# Altium PCB Rigid-Flex 2 - PCB Design.PcbDoc
Units mil, origin at the board's own origin, x right, y up, seen from the top; angles counter-clockwise.
Board outline 5000 x 3500 mil, 6 copper layers (Top Layer, GND, Mid1, Mid2, PWR, Bottom Layer), stack 32.112 mil thick; 21 components, 29 nets, 172 pads, 0 vias.
Unrouted connection lines stored in the file: 46.
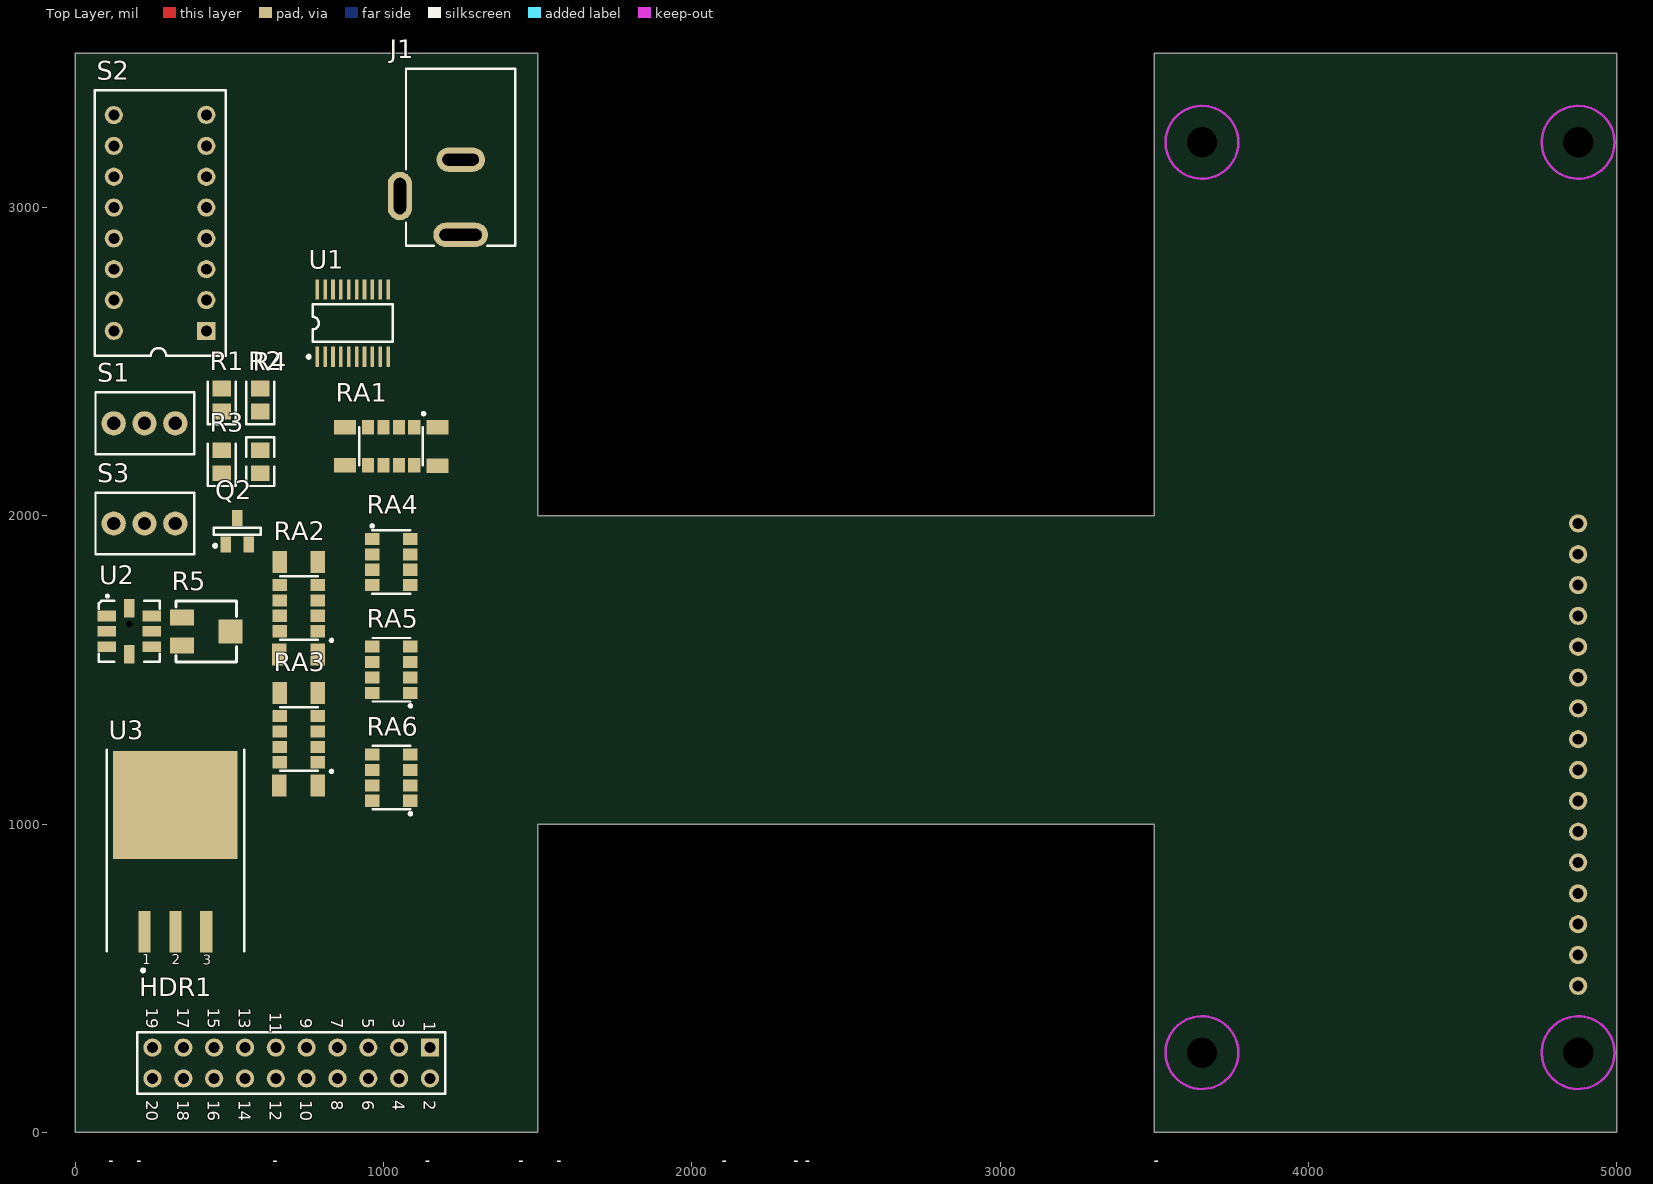
[diagram p0: Top Layer view]
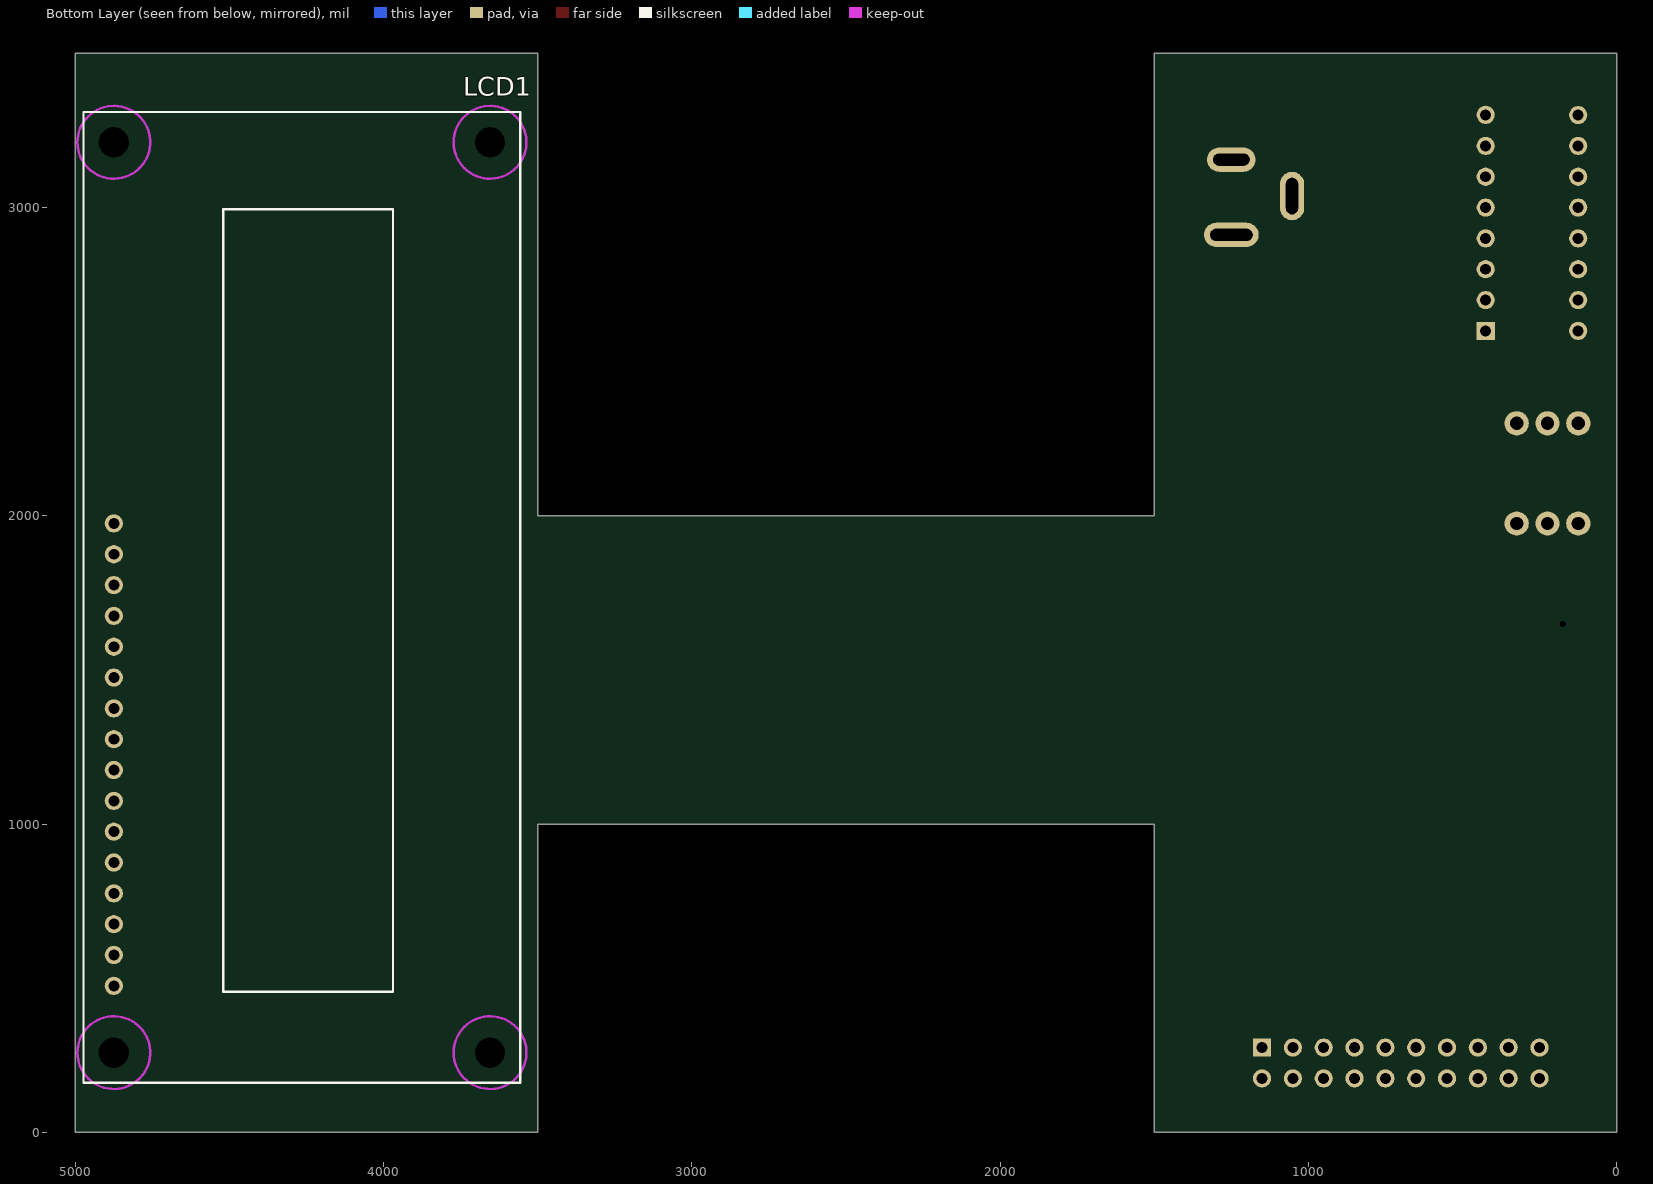
[diagram p1: Bottom Layer view, seen from below]
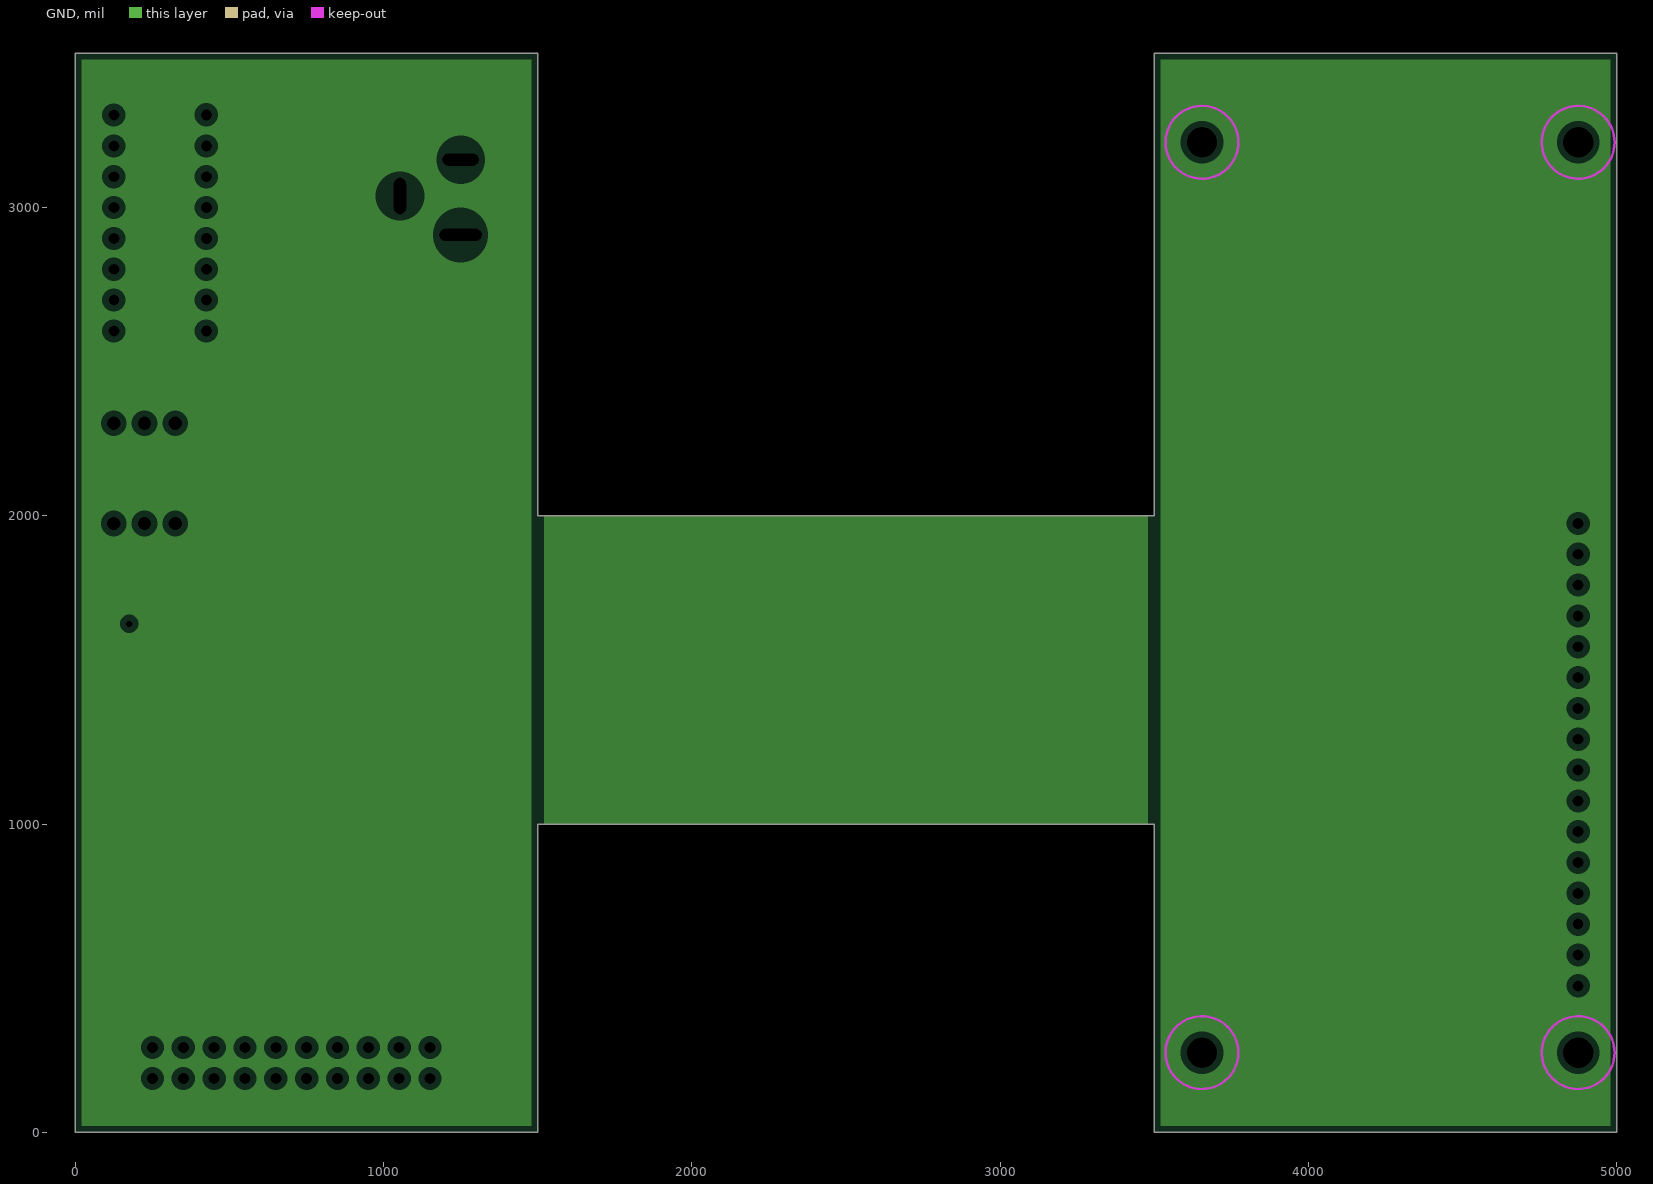
[diagram p2: GND, clearances drawn from the general rule]
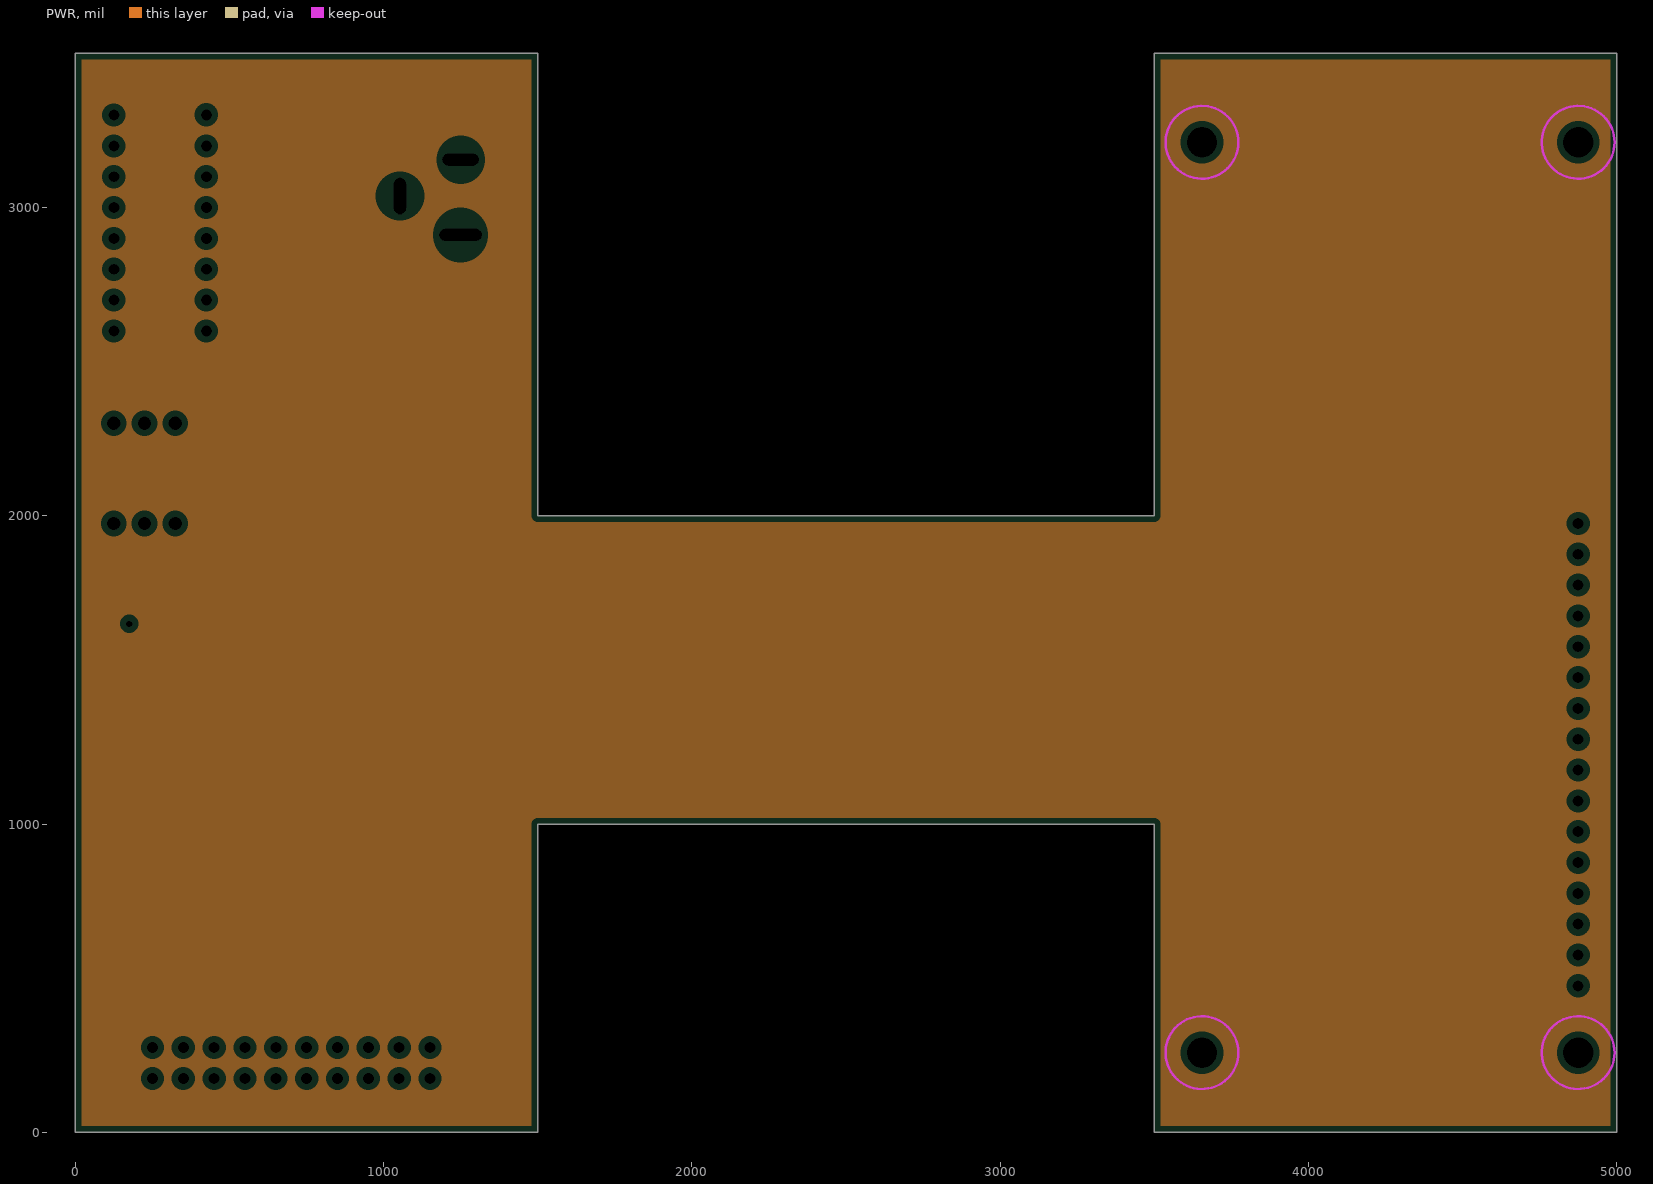
[diagram p3: PWR, clearances drawn from the general rule]

## Layer stack, top to bottom
Top Solder: solder mask 0.472, FC-001, Dk 4
Top Solder: solder mask 0.4, Solder Resist, Dk 3.5
Top Layer: signal copper 1.4
Dielectric 4: prepreg 2.8, PP-006, Dk 4.1
GND: plane copper 1.378
Dielectric 2: prepreg 2.8, PP-006, Dk 4.1
Mid1: signal copper 1.378
Dielectric 1: dielectric 12.6, FR-4, Dk 4.8
Mid2: signal copper 1.378
Dielectric 3: prepreg 2.8, PP-006, Dk 4.1
PWR: plane copper 1.378
Dielectric 5: prepreg 2.8, PP-006, Dk 4.1
Bottom Layer: signal copper 1.4
Flex Bottom Coverlay: solder mask 0.4, Solder Resist, Dk 3.5
Flex Bottom Coverlay: solder mask 0.472, FC-001, Dk 4

## Board outline
0,0 1500,0 1500,1000 3500,1000 3500,0 5000,0 5000,3500 3500,3500 3500,2000 1500,2000 1500,3500 0,3500
board region "Rigid Layer Stack Region - Right": 3500,3500 3500,0 5000,0 5000,3500
board region "Rigid Layer Stack Region - Left": 0,0 1500,0 1500,3500 0,3500
board region Flex: 1500,1000 3500,1000 3500,2000 1500,2000

## Design rules (kind name [scope] priority, off if disabled: settings)
Clearance [All] p1: gap=10 ignorepadtopadclearanceinfootprint=FALSE except(0: Arc-Hole Track-Hole SMDPad-Hole THPad-Hole Via-Hole Fill-Hole Poly-Hole Region-Hole Text-Hole)
DiffPairsRouting [All] p1: maxlimit=10 minlimit=10 mostfreqgap=10 toplayer_minwidth=15 toplayer_maxwidth=15 toplayer_prefwidth=15 midlayer1_minwidth=15 midlayer1_maxwidth=15 midlayer1_prefwidth=15 midlayer2_minwidth=15 midlayer2_maxwidth=15 midlayer2_prefwidth=15 bottomlayer_minwidth=15 bottomlayer_maxwidth=15 bottomlayer_prefwidth=15 substack1={B5968FE7-CA1D-4CA5-8B2D-EEA0998704F7} toplayer_{b5968fe7-ca1d-4ca5-8b2d-eea0998704f7}_minwidth=15 toplayer_{b5968fe7-ca1d-4ca5-8b2d-eea0998704f7}_maxwidth=15 toplayer_{b5968fe7-ca1d-4ca5-8b2d-eea0998704f7}_prefwidth=15 midlayer1_{b5968fe7-ca1d-4ca5-8b2d-eea0998704f7}_minwidth=15 midlayer1_{b5968fe7-ca1d-4ca5-8b2d-eea0998704f7}_maxwidth=15 midlayer1_{b5968fe7-ca1d-4ca5-8b2d-eea0998704f7}_prefwidth=15 midlayer2_{b5968fe7-ca1d-4ca5-8b2d-eea0998704f7}_minwidth=15 midlayer2_{b5968fe7-ca1d-4ca5-8b2d-eea0998704f7}_maxwidth=15 midlayer2_{b5968fe7-ca1d-4ca5-8b2d-eea0998704f7}_prefwidth=15 bottomlayer_{b5968fe7-ca1d-4ca5-8b2d-eea0998704f7}_minwidth=15 bottomlayer_{b5968fe7-ca1d-4ca5-8b2d-eea0998704f7}_maxwidth=15 bottomlayer_{b5968fe7-ca1d-4ca5-8b2d-eea0998704f7}_prefwidth=15 maxuncoupledlength=500
PlaneClearance [All] p1: clearance=20
PlaneConnect [All] p1: planeconnectstyle=Relief reliefexpansion=20 reliefentries=4 reliefconductorwidth=10 reliefairgap=10
PolygonConnect [All] p1: connectstyle=Relief reliefconductorwidth=10 reliefentries=4 polygonreliefangle="90 Angle" airgapwidth=10
RoutingVias [All] p1: holewidth=28 width=50 viastyle="Through Hole" minholewidth=28 minwidth=50 maxholewidth=28 maxwidth=50
SolderMaskExpansion [All] p1: expansion=4 istentingtop=FALSE
SupplyNets "Schematic Supply Nets_1" [InNet('GND')] p1: voltage=0.000
SupplyNets "Schematic Supply Nets" [InNet('5V')] p2: voltage=0.000
Width [All] p1: maxlimit=10 minlimit=10 preferedwidth=10 substack1={B5968FE7-CA1D-4CA5-8B2D-EEA0998704F7}
27 further rules are at their usual default settings.

## Classes and differential pairs
net class LCD_DB[7..0]: LCD_DB0 LCD_DB1 LCD_DB2 LCD_DB3 LCD_DB4 LCD_DB5 LCD_DB6 LCD_DB7

## Components (designator, comment, footprint, x,y, rotation, side; value= is the part's Value field where it differs from the comment)
HDR1 "Header 10X2" HDR2X10 1150,275 r180 top
J1 "KLD-0202-B" KLD-0202 1250,3450 r270 top
LCD1 "162A" 162A 4875,475 r90 bottom
Q2 "2N7002" SO-G3 525,1950 r0 top
R1 "68R" CC2012-0805 475,2375 r90 top
R2 "68R" CC2012-0805 600,2375 r90 top
R3 "560R" CC2012-0805 475,2175 r90 top
R4 "10K" CR2012-0805 600,2175 r90 top
R5 "20K" POT4MM-2 425,1625 r0 top
RA1 "4K7" MNR34T 1025,2225 r90 top
RA2 "4K7" MNR34T 725,1700 r0 top
RA3 "4K7" MNR34T 725,1275 r0 top
RA4 "270R" MNR34 1025,1850 r0 top
RA5 "270R" MNR34 1025,1500 r180 top
RA6 "270R" MNR34 1025,1150 r180 top
S1 "TL36WW050" PCB_SWITCH 325,2300 r180 top
S2 "A6ER-8104" DIP-16-KEY 425,2600 r90 top
S3 "TL36WW050" PCB_SWITCH 325,1975 r180 top
U1 "XCF02SVO20C" VO20 900,2625 r0 top
U2 "ADXL202E" E-8 175,1625 r0 top
U3 "LM1084IS-ADJ" TO-263 225,650 r0 top

## Footprints (in the part's own frame and the unit in brackets; to place one, negate y for a bottom-side part, rotate by r counter-clockwise, add the part's x,y. Pads: shape width x height; smd on the part's side, far side on the other; paste and mask are expansions set on the pad)
162A [mm]
  round 1.5 hole 0.9: 1(0,0) 2(2.54,0) 3(5.08,0) 4(7.62,0) 5(10.16,0) 6(12.7,0) 7(15.24,0) 8(17.78,0) 9(20.32,0) 10(22.86,0) 11(25.4,0) 12(27.94,0) 13(30.48,0) 14(33.02,0) 15(35.56,0) 16(38.1,0)
  round 2.3 hole 2.5 unplated: M1(-5.5,0) M2(69.5,0) M3(-5.5,-31) M4(69.5,-31)
  Keep-Out Layer circle w0.2: c69.5,0 r3
  Keep-Out Layer circle w0.2: c69.5,-31 r3
  Keep-Out Layer circle w0.2: c-5.5,-31 r3
  Keep-Out Layer circle w0.2: c-5.5,0 r3
  silkscreen extent -8,-33.5 72,2.5, body extent -8.01,-33.5 72,2.5, height 10.16
CC2012-0805 [mm]
  rect 1.3x1.5 smd: 1(-0.945,-0.007) 2(0.955,-0.007)
  silkscreen extent -1.99,-1.16 1.51,1.14, body extent -1.52,-0.7 1.52,0.7, height 0.76
CR2012-0805 [mm]
  rect 1.3x1.5 smd: 1(-0.946,0) 2(0.954,0)
  silkscreen extent -2,-1.15 2,1.15, body extent -1.52,-0.7 1.52,0.7, height 0.76
DIP-16-KEY [mm]
  rect 1.5x1.5 hole 0.9: 1(-0.011,0.001)
  round 1.5 hole 0.9: 2(2.529,0.001) 3(5.069,0.001) 4(7.609,0.001) 5(10.149,0.001) 6(12.689,0.001) 7(15.229,0.001) 8(17.789,0.001) 9(17.769,7.621) 10(15.229,7.621) 11(12.689,7.621) 12(10.149,7.621) 13(7.609,7.621) 14(5.069,7.621) 15(2.529,7.621) 16(-0.011,7.621)
  silkscreen extent -2.06,-1.59 19.82,9.2, body extent -2.03,-1.52 19.81,9.14, height 7.11
E-8 [mil]
  round 15 hole 20 unplated: 0(-0.02,23.98)
  rect 60x35 smd: 1(-72.85,49.98) 2(-72.85,-0.02) 3(-72.85,-50.02) 5(72.82,-50.02) 6(72.82,-0.02) 7(72.82,49.98)
  rect 35x60 smd: 4(-0.02,-74.82) 8(-0.02,74.79)
  silkscreen extent -98,-98 99,118, body extent -95,-95 95,95, height 80
HDR2X10 [mm]
  rect 1.5x1.5 hole 0.9: 1(-0.011,0.007)
  round 1.5 hole 0.9: 2(-0.011,2.547) 3(2.529,0.007) 4(2.529,2.547) 5(5.069,0.007) 6(5.069,2.547) 7(7.609,0.007) 8(7.609,2.547) 9(10.149,0.007) 10(10.149,2.547) 11(12.689,0.007) 12(12.689,2.547) 13(15.229,0.007) 14(15.229,2.547) 15(17.769,0.007) 16(17.769,2.547) 17(20.309,0.007) 18(20.309,2.547) 19(22.849,0.007) 20(22.849,2.547)
  silkscreen extent -1.28,-1.26 24.12,3.82, body extent -1.27,-1.27 24.13,3.81, height 10
KLD-0202 [mm]
  oval 2x4.5 hole 1 slot 3.5 at 90 deg: 1(13.692,-0.001)
  oval 2x4 hole 1 slot 3 at 90 deg: 2(7.492,-0.001)
  oval 4x2 hole 1 slot 3 at 0 deg: 3(10.492,-5.001)
  silkscreen extent -0.01,-4.5 14.59,4.5, body extent 0,-4.44 14.6,4.45, height 7.62
MNR34 [mm]
  rect 1.2x1 smd: 1(-1.578,1.898) 2(-1.578,0.628) 3(-1.578,-0.642) 4(-1.578,-1.912) 5(1.572,-1.912) 6(1.572,-0.642) 7(1.572,0.628) 8(1.572,1.898)
  silkscreen extent -1.68,-2.62 1.55,3.06, body extent -2.03,-2.29 2.03,2.29, height 1.27
MNR34T [mm]
  rect 1.2x1 smd: 1(1.575,-1.896) 2(1.575,-0.626) 3(1.575,0.644) 4(1.575,1.914) 5(-1.575,1.914) 6(-1.575,0.644) 7(-1.575,-0.626) 8(-1.575,-1.896)
  rect 1.2x1.8 smd: STP(-1.6,-3.801) STP(-1.575,3.819) STP(1.575,3.819) STP(1.575,-3.801)
  silkscreen extent -1.55,-2.76 2.79,2.62, body extent -1.65,-2.71 1.68,2.72, height 2
PCB_SWITCH [mm]
  round 2 hole 1.1: 1(0.011,0.005) 2(2.551,0.005) 3(5.091,0.005)
  silkscreen extent -1.54,-2.53 6.59,2.55, body extent -1.52,-2.54 6.6,2.54, height 15
POT4MM-2 [mm]
  rect 2x1.3 smd: CCW(-2.008,-1.162) CW(-2.008,1.138)
  rect 2x2 smd: W(1.992,-0.012)
  silkscreen extent -2.51,-2.51 2.49,2.49, body extent -2.92,-2.41 2.92,2.41, height 3.05
SO-G3 [mm]
  rect 0.85x1.3 smd: 1(-0.939,-1.107) 2(0.961,-1.107) 3(0.011,1.093)
  silkscreen extent -1.94,-1.33 1.96,0.29, body extent -1.65,-1.52 1.65,1.51, height 2.54
TO-263 [mm]
  rect 1x3.4 smd: 1(-0.006,0.009) 2(2.534,0.009) 3(5.074,0.009)
  rect 10.25x8.9 smd: 4(2.534,10.459)
  silkscreen extent -3.11,-3.29 8.19,15.01, body extent -2.29,-1.14 7.37,14.35, height 2.03
VO20 [mm]
  rect 0.3x1.65 smd: 1(-2.929,-2.778) 2(-2.279,-2.778) 3(-1.629,-2.778) 4(-0.979,-2.778) 5(-0.329,-2.778) 6(0.321,-2.778) 7(0.971,-2.778) 8(1.621,-2.778) 9(2.271,-2.778) 10(2.921,-2.778) 11(2.921,2.772) 12(2.271,2.772) 13(1.621,2.772) 14(0.971,2.772) 15(0.321,2.772) 16(-0.329,2.772) 17(-0.979,2.772) 18(-1.629,2.772) 19(-2.279,2.772) 20(-2.929,2.772)
  silkscreen extent -3.75,-2.9 3.3,1.55, body extent -3.3,-3.56 3.3,3.55, height 1.52

## Part data
HDR1: "Header, 10-Pin, Dual row", Revision="July-2002: Re-released for DXP Platform."
J1: "Low Voltage Power Supply Connector", Manufacturer=Kycon, AEMS Code=3510211
LCD1: "16 char * 2 line LCD character display with b/light"
Q2: "N Channel Mosfet"
R1 R2: library part RES_2, "Resistor", AEMS Code=1200821
R3 R4: library part RES, "Resistor"
  R3: AEMS Code=1200723
  R4: AEMS Code=1200006JT
R5: library part "RPot SM", "Square Trimming Potentiometer", AEMS Code=1400226
RA1 RA2 RA3 RA4 RA5 RA6: library part MNR34, "3216x4 Resistor Array"
  RA1 RA2 RA3: AEMS Code=1300330
  RA4 RA5 RA6: AEMS Code=1310010
S1 S3: library part PCB_MOUNT_SWITCH, "SPDT Subminiature Toggle Switch", Supplier=FARNELL, Supplier Code=150-559
S2: "DIP Switch Side actuator long liver Piano Key", Revision="July-2002: Re-released for DXP Platform."
U1: "XCF00S Series, Platform Flash In-System Programmable Configuration 3.3V PROM, 20-Pin TSOP, 2-Megabit, Commercial Grade", PackageDocument="ver1.0, May-2003", AEMS Code="CHANGED VALUE", Code_JEDEC=MO-153-AC, DatasheetDocument="ver2.3, May-2004", PackageReference=VO20
U2: "Accelerometer with Digital Output"
U3: "5A Low Dropout Possitive Regulators"

## Nets (pads, with @x,y where several pads share a name; then routed paths per layer and width w, separated by ;. In a path a pad name is that pad's centre, name@x,y a point inside that pad or via, vN(x,y) a via of type N, cw(c..) or ccw(c..) an arc to the next point about the centre after c; other vN are vias at no path point)
5V: LCD1.2 LCD1.15 R5.CW RA1.1 RA1.2 RA1.3 RA1.4 RA2.1 RA2.2 RA2.3 RA2.4 RA3.1 RA3.2 RA3.3 RA3.4
GND: LCD1.1 Q2.2 R4.1 R5.CCW
LCD_CONTRAST: LCD1.3 R5.W
LCD_DB0: RA5.5
LCD_DB1: RA5.6
LCD_DB2: RA5.7
LCD_DB3: RA5.8
LCD_DB4: RA4.5
LCD_DB5: RA4.6
LCD_DB6: RA4.7
LCD_DB7: RA4.8
LCD_DB#0: LCD1.7 RA2.5 RA5.4
LCD_DB#1: LCD1.8 RA2.6 RA5.3
LCD_DB#2: LCD1.9 RA2.7 RA5.2
LCD_DB#3: LCD1.10 RA2.8 RA5.1
LCD_DB#4: LCD1.11 RA1.5 RA4.4
LCD_DB#5: LCD1.12 RA1.6 RA4.3
LCD_DB#6: LCD1.13 RA1.7 RA4.2
LCD_DB#7: LCD1.14 RA1.8 RA4.1
LCD_E: RA6.8
LCD_E#: LCD1.6 RA3.8 RA6.1
LCD_LIGHT: R3.1
LCD_RS: RA6.6
LCD_RS#: LCD1.4 RA3.6 RA6.3
LCD_RW: RA6.7
LCD_RW#: LCD1.5 RA3.7 RA6.2
NetLCD1_16: LCD1.16 R1.1 R2.1
NetQ2_1: Q2.1 R3.2 R4.2
NetQ2_3: Q2.3 R1.2 R2.2
pads on no net: HDR1.1 HDR1.2 HDR1.3 HDR1.4 HDR1.5 HDR1.6 HDR1.7 HDR1.8 HDR1.9 HDR1.10 HDR1.11 HDR1.12 HDR1.13 HDR1.14 HDR1.15 HDR1.16 HDR1.17 HDR1.18 HDR1.19 HDR1.20 J1.1 J1.2 J1.3 LCD1.M1 LCD1.M2 LCD1.M3 LCD1.M4 RA1.STP RA2.STP RA3.5 RA3.STP RA6.4 RA6.5 S1.1 S1.2 S1.3 S2.1 S2.2 S2.3 S2.4 S2.5 S2.6 S2.7 S2.8 S2.9 S2.10 S2.11 S2.12 S2.13 S2.14 S2.15 S2.16 S3.1 S3.2 S3.3 U1.1 U1.2 U1.3 U1.4 U1.5 U1.6 U1.7 U1.8 U1.9 U1.10 U1.11 U1.12 U1.13 U1.14 U1.15 U1.16 U1.17 U1.18 U1.19 U1.20 U2.0 U2.1 U2.2 U2.3 U2.4 U2.5 U2.6 U2.7 U2.8 U3.1 U3.2 U3.3 U3.4

## Polygon pours and split planes (outlines as drawn)
no net on GND (split plane): 4979.9,3479.9 4979.9,20.1 3520.1,20.1 3520.1,3479.9
no net on GND (split plane): 1479.9,3479.9 1479.9,20.1 20.1,20.1 20.1,3479.9
no net on PWR (split plane): 4979.9,3479.9 4979.9,20.1 3520.1,20.1 3520.1,1000 3519.71,1003.92 3518.57,1007.69 3516.71,1011.16 3514.21,1014.21 3511.16,1016.71 3507.69,1018.57 3503.92,1019.71 3500,1020.1 1500,1020.1 1496.08,1019.71 1492.31,1018.57 1488.84,1016.71 1485.79,1014.21 1483.29,1011.16 1481.43,1007.69 1480.29,1003.92 1479.9,1000 1479.9,20.1 20.1,20.1 20.1,3479.9 1479.9,3479.9 1479.9,2000 1480.29,1996.08 1481.43,1992.31 1483.29,1988.84 1485.79,1985.79 1488.84,1983.29 1492.31,1981.43 1496.08,1980.29 1500,1979.9 3500,1979.9 3503.92,1980.29 3507.69,1981.43 3511.16,1983.29 3514.21,1985.79 3516.71,1988.84 3518.57,1992.31 3519.71,1996.08 3520.1,2000 3520.1,3479.9

## Silkscreen, mask and mechanical layers (free items; w line width, h text height)
Flex Top Overlay:
  text "Altium Advanced Training: '.Pcb_File_Name_No_Path'" at 5,-196.68 h100
Layer Stack:
  drawing of 492 lines, arcs and shapes, not listed
  text "Layer" at 5537.5,2687.86 h30
  text "Name" at 5742.46,2687.86 h30
  text "Material" at 6382.27,2687.86 h30
  text "Thickness" at 6812.16,2687.86 h30
  text "Constant" at 7137.07,2687.86 h30
  text "Rigid 1" at 7422,2687.86 h30
  text "Flex" at 7676.94,2687.86 h30
  text "Top Overlay" at 5742.46,2627.86 h30
  text "Flex Top Overlay" at 5742.46,2567.86 h30
  text "Flex Top Coverlay" at 5742.46,2507.86 h30
  text "FC-001" at 6382.27,2507.86 h30
  text "0.47mil" at 6812.16,2507.86 h30
  text "4" at 7137.07,2507.86 h30
  text "Top Solder" at 5742.46,2447.86 h30
  text "Solder Resist" at 6382.27,2447.86 h30
  text "0.40mil" at 6812.16,2447.86 h30
  text "3.5" at 7137.07,2447.86 h30
  text "1" at 5537.5,2387.86 h30
  text "Top Layer" at 5742.46,2387.86 h30
  text "1.40mil" at 6812.16,2387.86 h30
  text "Dielectric 4" at 5742.46,2327.86 h30
  text "PP-006" at 6382.27,2327.86 h30
  text "2.80mil" at 6812.16,2327.86 h30
  text "4.1" at 7137.07,2327.86 h30
  text "2" at 5537.5,2267.86 h30
  text "GND" at 5742.46,2267.86 h30
  text "CF-004" at 6382.27,2267.86 h30
  text "1.38mil" at 6812.16,2267.86 h30
  text "Dielectric 2" at 5742.46,2207.86 h30
  text "PP-006" at 6382.27,2207.86 h30
  text "2.80mil" at 6812.16,2207.86 h30
  text "4.1" at 7137.07,2207.86 h30
  text "3" at 5537.5,2147.86 h30
  text "Mid1" at 5742.46,2147.86 h30
  text "CF-004" at 6382.27,2147.86 h30
  text "1.38mil" at 6812.16,2147.86 h30
  text "Dielectric 1" at 5742.46,2087.86 h30
  text "FR-4" at 6382.27,2087.86 h30
  text "12.60mil" at 6812.16,2087.86 h30
  text "4.8" at 7137.07,2087.86 h30
  text "4" at 5537.5,2027.86 h30
  text "Mid2" at 5742.46,2027.86 h30
  text "CF-004" at 6382.27,2027.86 h30
  text "1.38mil" at 6812.16,2027.86 h30
  text "Dielectric 3" at 5742.46,1967.86 h30
  text "PP-006" at 6382.27,1967.86 h30
  text "2.80mil" at 6812.16,1967.86 h30
  text "4.1" at 7137.07,1967.86 h30
  text "5" at 5537.5,1907.86 h30
  text "PWR" at 5742.46,1907.86 h30
  text "CF-004" at 6382.27,1907.86 h30
  text "1.38mil" at 6812.16,1907.86 h30
  text "Dielectric 5" at 5742.46,1847.86 h30
  text "PP-006" at 6382.27,1847.86 h30
  text "2.80mil" at 6812.16,1847.86 h30
  text "4.1" at 7137.07,1847.86 h30
  text "6" at 5537.5,1787.86 h30
  text "Bottom Layer" at 5742.46,1787.86 h30
  text "1.40mil" at 6812.16,1787.86 h30
  text "Bottom Solder" at 5742.46,1727.86 h30
  text "Solder Resist" at 6382.27,1727.86 h30
  text "0.40mil" at 6812.16,1727.86 h30
  text "3.5" at 7137.07,1727.86 h30
  text "Flex Bottom Coverlay" at 5742.46,1667.86 h30
  text "FC-001" at 6382.27,1667.86 h30
  text "0.47mil" at 6812.16,1667.86 h30
  text "4" at 7137.07,1667.86 h30
  text "Flex Bottom Overlay" at 5742.46,1607.86 h30
  text "Bottom Overlay" at 5742.46,1547.86 h30
  text "Total board thickness (Rigid 1):" at 5537.5,1487.86 h30
  text "32.91mil" at 6812.16,1487.86 h30

## Text inside footprints (layer, text, board x,y; h text height)
HDR1: Flex Top Overlay "20" at 230.44,104.72 h39.37 r270; Flex Top Overlay "19" at 230.44,404.72 h39.37 r270; Flex Top Overlay "1" at 1130.44,359.72 h39.37 r270; Flex Top Overlay "2" at 1130.44,104.72 h39.37 r270; Flex Top Overlay "16" at 430.44,104.72 h39.37 r270; Flex Top Overlay "12" at 630.44,104.72 h39.37 r270; Flex Top Overlay "6" at 930.44,104.72 h39.37 r270; Flex Top Overlay "15" at 430.44,404.72 h39.37 r270; Flex Top Overlay "11" at 630.44,389.72 h39.37 r270; Flex Top Overlay "5" at 930.44,369.72 h39.37 r270; Flex Top Overlay "18" at 330.44,104.72 h39.37 r270; Flex Top Overlay "17" at 330.44,404.72 h39.37 r270; Flex Top Overlay "14" at 530.44,104.72 h39.37 r270; Flex Top Overlay "13" at 530.44,404.72 h39.37 r270; Flex Top Overlay "10" at 730.44,104.72 h39.37 r270; Flex Top Overlay "9" at 730.44,369.72 h39.37 r270; Flex Top Overlay "8" at 830.44,104.72 h39.37 r270; Flex Top Overlay "7" at 830.44,369.72 h39.37 r270; Flex Top Overlay "4" at 1030.44,104.72 h39.37 r270; Flex Top Overlay "3" at 1030.44,369.72 h39.37 r270
U3: Flex Top Overlay "1" at 217.1,545.02 h31.5; Flex Top Overlay "3" at 412.97,544.04 h31.5; Flex Top Overlay "2" at 312.11,545.54 h31.5